# Altium PCB ut_mbed_programmer.PcbDoc
Units mm, origin at the board's own origin, x right, y up, seen from the top; angles counter-clockwise.
Board outline 30 x 16 mm, 2 copper layers (Top Layer, Bottom Layer), stack 1.571 mm thick; 33 components, 30 nets, 148 pads, 33 vias.
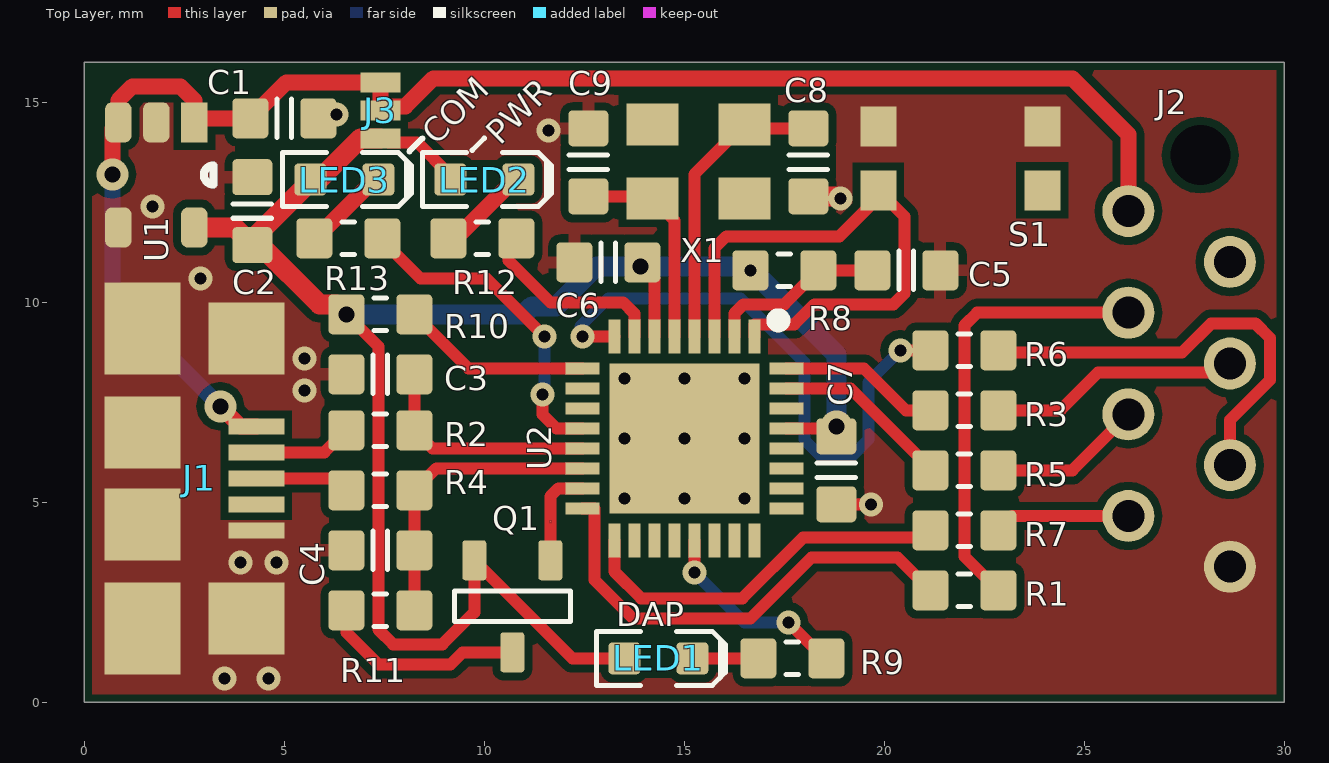
[diagram p0: Top Layer view]
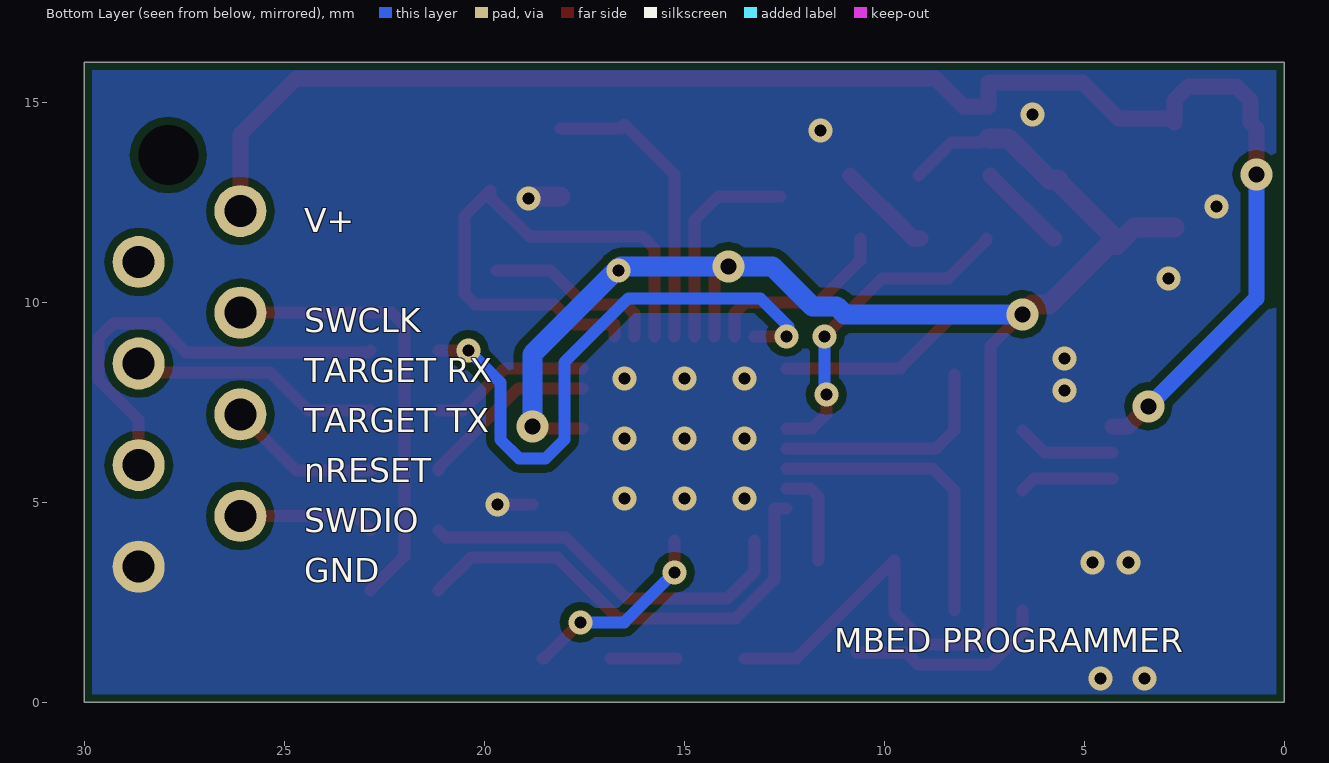
[diagram p1: Bottom Layer view, seen from below]
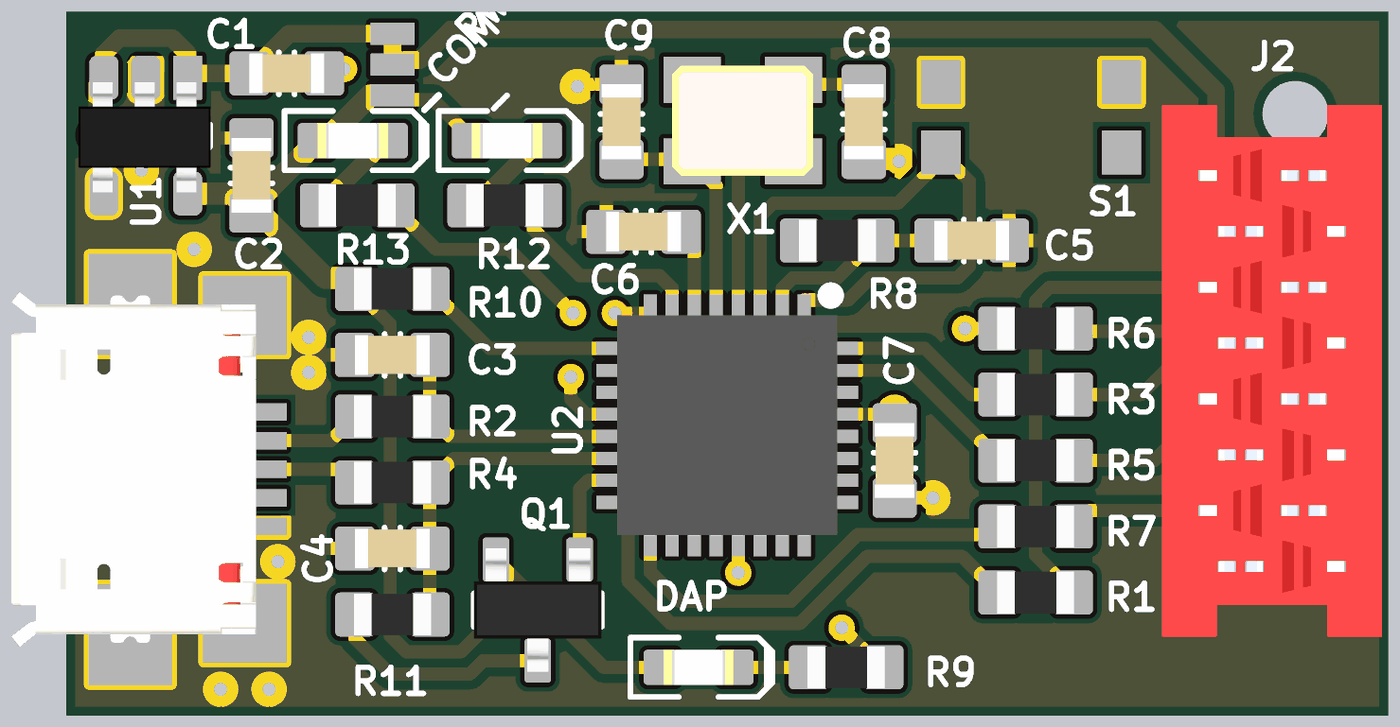
[diagram p2: 3D render of the assembled board from above, using the file's embedded part models]

## Layer stack, top to bottom
Top Solder: solder mask 0.0102, Solder Resist, Dk 3.5
Top Layer: signal copper 0.0356
Dielectric 1: dielectric 1.5, FR-4, Dk 4.8
Bottom Layer: signal copper 0.0356
Bottom Solder: solder mask 0.0102, Solder Resist, Dk 3.5

## Board outline
0,0 30,0 30,16 0,16

## Design rules (kind name [scope] priority, off if disabled: settings)
BoardOutlineClearance [All] p1: gap=0.2 ignorepadtopadclearanceinfootprint=FALSE except(0: Arc-SplitContinuation Track-SplitContinuation SMDPad-SplitContinuation THPad-SplitContinuation Via-SplitContinuation Fill-SplitContinuation Poly-SplitContinuation Region-SplitContinuation Text-SplitContinuation)
Clearance [All] p1: gap=0.2 ignorepadtopadclearanceinfootprint=FALSE except(0: Arc-Hole Track-Hole SMDPad-Hole THPad-Hole Via-Hole Fill-Hole Poly-Hole Region-Hole Text-Hole)
ComponentClearance [All] p1: gap=0.2 collisioncheckmode=3 verticalgap=0.2 showdistances=FALSE
HoleSize [All] p1: absolutevalues=TRUE maxlimit=5 minlimit=0.3 maxpercent=80.000 minpercent=20.000
HoleToHoleClearance [All] p1: gap=0.3 allowstackedmicrovias=TRUE
MinimumSolderMaskSliver [All] p1: minsoldermaskwidth=0.2
PolygonConnect PolygonConnectDirect [IsVia or InComponent('J1' ) or InComponent('J2') or InComponent('U1') or InComponent('S1')] p1: connectstyle=Direct reliefconductorwidth=0.3 reliefentries=4 polygonreliefangle="90 Angle" airgapwidth=0.2
PolygonConnect [All] p2: connectstyle=Relief reliefconductorwidth=0.3 reliefentries=4 polygonreliefangle="90 Angle" airgapwidth=0.2
RoomDefinition ut_mbed_programmer [InComponentClass('ut_mbed_programmer')] p1: confinementstyle=ConfineIn formatcopy=TRUE lockcomponents=FALSE outline -8,-6.85 69.3,-6.85 69.3,44.85 -8,44.85
RoutingVias [All] p1: holewidth=0.3 width=0.6 viastyle="Through Hole" minholewidth=0.3 minwidth=0.6 maxholewidth=5 maxwidth=10
SilkToSilkClearance [All] p1: silktosilkclearance=0.2
SilkToSolderMaskClearance [IsPad] p1: minsilkscreentomaskgap=0.2 clearancetoexposedcopper=TRUE
SolderMaskExpansion SolderMaskExpansionVia [IsVia] p1: expansion=-5
SolderMaskExpansion [All] p2: expansion=0.102
Width [All] p1: maxlimit=5 minlimit=0.2 preferedwidth=0.3
24 further rules are at their usual default settings.

## Components (designator, comment, footprint, x,y, rotation, side; value= is the part's Value field where it differs from the comment)
C1 "1u" CAPC1608X90N 5,14.6 r0 top value=1µ
C2 "1u" CAPC1608X90N 4.2,12.28 r90 top value=1µ
C3 "18p" CAPC1608X90N 7.4,8.2 r180 top value=8p
C4 "18p" CAPC1608X90N 7.4,3.8 r180 top value=8p
C5 "100n" CAPC1608X90N 20.55,10.8 r0 top value=8p
C6 "100n" CAPC1608X90N 13.1,11 r180 top value=8p
C7 "100n" CAPC1608X90N 18.8,5.8 r270 top value=8p
C8 "18p" CAPC1608X90N 18.1,13.5 r270 top value=8p
C9 "18p" CAPC1608X90N 12.6,13.5 r90 top value=8p
J1 "USB-B-MICRO" USB-B-MICRO-FCI-10104110 4.3,5.6 r270 top
J2 "HEADER-8" MICRO-MATCH-FOB-08 26.1,12.28 r90 top
J3 "JUMPER" JUMPER-SMD-3WAY-1005 7.4,14.8 r270 top
LED1 "White" LED-0603-WHITE 14.35,1.1 r0 top
LED2 "White" LED-0603-WHITE 10,13.07 r0 top
LED3 "White" LED-0603-WHITE 6.5,13.07 r0 top
Q1 "BSS84" SOT23-3 10.7,2.4 r270 top
R1 "470R" RESC1608X55N 22,2.8 r0 top value=1K
R2 "33R" RESC1608X55N 7.4,6.8 r0 top value=1K
R3 "470R" RESC1608X55N 22,7.3 r0 top value=1K
R4 "33R" RESC1608X55N 7.4,5.3 r0 top value=1K
R5 "470R" RESC1608X55N 22,5.8 r0 top value=1K
R6 "470R" RESC1608X55N 22,8.8 r0 top value=1K
R7 "470R" RESC1608X55N 22,4.3 r0 top value=1K
R8 "10k" RESC1608X55N 17.5,10.8 r0 top value=1K
R9 "470R" RESC1608X55N 17.7,1.1 r180 top value=1K
R10 "10k" RESC1608X55N 7.4,9.7 r180 top value=1K
R11 "1.5k" RESC1608X55N 7.4,2.3 r180 top value=1K
R12 "470R" RESC1608X55N 9.95,11.6 r180 top value=1K
R13 "470R" RESC1608X55N 6.6,11.6 r180 top value=1K
S1 "PUSHBUTTON" KMR421NGLFS 21.9,13.6 r0 top
U1 "MIC5504-3.3" SOT23-5 2.75,14.5 r270 top
U2 "LPC11U35FHN33" HVQFN33 16.75,9.15 r270 top
X1 "12MHz" XTAL-3.2x2.5 16.5,14.45 r180 top

## Footprints (in the part's own frame and the unit in brackets; to place one, negate y for a bottom-side part, rotate by r counter-clockwise, add the part's x,y. Pads: shape width x height; smd on the part's side, far side on the other; paste and mask are expansions set on the pad)
CAPC1608X90N [mm] "Chip Capacitor, Body 1.6x0.8mm, EIA 0603, IPC Medium Density"
  round 0.254 on Mech15: 0(0,0)
  rrect25% 0.9x1 smd: 1(-0.85,0) 2(0.85,0)
  Top Layer pour cut-out: -0.6,0.5 -0.4,0.7 0.4,0.7 0.6,0.5 0.6,-0.5 0.4,-0.7 -0.4,-0.7 -0.6,-0.5
  silkscreen extent -0.18,-0.48 0.18,0.48, body extent -0.85,-0.45 0.85,0.45, height 0.89
HVQFN33 [mm]
  rect 0.85x0.3 smd: 1(0,0) 2(0,-0.5) 3(0,-1) 4(0,-1.5) 5(0,-2) 6(0,-2.5) 7(0,-3) 8(0,-3.5) 17(5.1,-3.5) 18(5.1,-3) 19(5.1,-2.5) 20(5.1,-2) 21(5.1,-1.5) 22(5.1,-1) 23(5.1,-0.5) 24(5.1,0)
  rect 0.3x0.85 smd: 9(0.8,-4.3) 10(1.3,-4.3) 11(1.8,-4.3) 12(2.3,-4.3) 13(2.8,-4.3) 14(3.3,-4.3) 15(3.8,-4.3) 16(4.3,-4.3) 25(4.3,0.8) 26(3.8,0.8) 27(3.3,0.8) 28(2.8,0.8) 29(2.3,0.8) 30(1.8,0.8) 31(1.3,0.8) 32(0.8,0.8)
  rect 3.75x3.75 smd: 33(2.55,-1.75)
  silkscreen extent -0.5,0.5 -0.3,0.7, body extent 0.05,-4.25 5.05,0.75, height 0.94
JUMPER-SMD-3WAY-1005 [mm]
  rect 0.5x1 smd: 1(-0.7,0) 2(0,0) 3(0.7,0)
KMR421NGLFS [mm]
  rect 0.9x1 smd: 1(-2.05,0.8) 1(2.05,0.8) 2(-2.05,-0.8) 2(2.05,-0.8)
  body extent -2.1,-1.4 2.1,1.4, height 2.5
LED-0603-WHITE [mm]
  round 0.254 on Mech15: 0(0,0)
  rrect25% 0.8x0.8 smd: A(-0.85,0) K(0.85,0)
  Top Layer pour cut-out: -0.5,0.5 0.5,0.5 0.5,-0.5 -0.5,-0.5
  silkscreen extent -1.55,-0.67 1.68,0.67, body extent -0.8,-0.4 0.8,0.4, height 0.75
MICRO-MATCH-FOB-08 [mm]
  round 1.3 hole 0.8: 1(0,0) 2(-1.27,-2.54) 3(-2.54,0) 4(-3.81,-2.54) 5(-5.08,0) 6(-6.35,-2.54) 7(-7.62,0) 8(-8.89,-2.54)
  round 0 hole 1.5 unplated: drill(1.4,-1.8)
  body extent -10.49,-3.77 1.6,1.23, height 4
RESC1608X55N [mm] "Chip Resistor, Body 1.6x0.8mm, EIA 0603, IPC Medium Density"
  round 0.254 on Mech15: 0(0,0)
  rrect25% 0.9x1 smd: 1(-0.85,0) 2(0.85,0)
  Top Layer pour cut-out: -0.6,0.5 -0.4,0.7 0.4,0.7 0.6,0.5 0.6,-0.5 0.4,-0.7 -0.4,-0.7 -0.6,-0.5
  silkscreen extent -0.15,-0.41 0.15,0.41, body extent -0.87,-0.47 0.88,0.48, height 0.54
SOT23-3 [mm] "SOT23, 3 pin"
  round 0.5 on Mech15: 0(0,0)
  rrect25% 1x0.6 smd: 1(-1.15,0.95) 2(-1.15,-0.95) 3(1.15,0)
  silkscreen extent -0.38,-1.45 0.38,1.45, body extent -1.4,-1.45 1.4,1.45, height 1.29
SOT23-5 [mm]
  rect 1x0.66 smd: 1(0,0)
  rrect50% 1x0.66 smd: 2(0,-0.95) 3(0,-1.9) 4(2.63,-1.9) 5(2.63,0)
  silkscreen extent 1.08,0.24 1.55,0.48, body extent 0.1,-2.47 2.6,0.53, height 1.11
USB-B-MICRO-FCI-10104110 [mm]
  rect 0.4x1.4 smd: 1(-1.3,0) 2(-0.65,0) 3(0,0) 4(0.65,0) 5(1.3,0)
  rect 2.3x1.9 smd: SH(-3.75,-2.85) SH(3.758,-2.85)
  rect 1.8x1.9 smd: SH(-3.5,-0.25) SH(-1.15,-2.85) SH(1.15,-2.85) SH(3.5,-0.25)
  body extent -4.04,-5.55 4.04,0.01, height 2.68
XTAL-3.2x2.5 [mm]
  rect 1.3x1.05 smd: 1(0,0) 2(2.3,0) 3(2.3,1.85) 4(0,1.85)
  body extent -0.45,-0.32 2.75,2.18, height 0.8

## Part data
C1 C2: library part CAPC_1u_0603_X7R_16V_10%, "Capacitor SMD Cer 1uF 10% 16V X7R 0603", Manufacturer 1="TDK Corporation", Manufacturer Part Number 1=C1608X7R1C105K, Package / Case="0603 (1608 metric)", Ratings="16V; X7R", Supplier Part Number 1=445-1604-1-ND, Tolerance=±10%, ComponentLink1Description=http://product.tdk.com/capacitor/mlcc/en/documents/mlcc_commercial_general_en.pdf, ComponentLink1URL=http://product.tdk.com/capacitor/mlcc/en/documents/mlcc_commercial_general_en.pdf, Material=ceramic, SCDType=spec, Supplier 1=Digi-Key
C3 C4 C5 C6 C7 C8 C9: library part CAPC_8p_0603_NP0_50V, "Capacitor SMD Cer 8pF ±0.5pF 50V NP0 0603", Manufacturer 1="Murata Electronics North America", Manufacturer Part Number 1=GRM1885C1H8R0DZ01D, Operating Temperature="-55°C ~ 125°C", Package / Case="0603 (1608 Metric)", Ratings="50V; NP0", Supplier Part Number 1=490-1399-1-ND, Tolerance=±0.5pF, ComponentLink1Description="GRM1885C1H8R0DZ01 datasheet.pdf", ComponentLink1URL=http://search.murata.co.jp/Ceramy/image/img/PDF/ENG/GRM1885C1H8R0DZ01.pdf, SCDType=undef, Size / Dimension="0.063\" L x 0.032\" W (1.60mm x 0.81mm)", Supplier 1=Digi-Key, Thickness (Max)="0.035\" (0.90mm)"
J3: library part JUMPER-SMD-3WAY
LED1 LED2 LED3: library part LED_SMD_White_0603_Bright, "LED 0603 SMD Bright White 8700K", Luminous Flux @ Current - Test=-, Manufacturer 1="Lite-On Inc", Manufacturer 2="Kingbright Corp", Manufacturer Part Number 1=LTW-C193TS5, Manufacturer Part Number 2=APT1608QWF/D, Millicandela Rating=230mcd, Package / Case="0603 (1608 metric)", Ratings="Ultra Bright; 8700K", Supplier Part Number 1=160-1721-1-ND, Voltage - Forward (Vf) @ 10mA=3.0V, Voltage - Forward (Vf) Typ=3.3V, Color=White, ComponentLink1Description=http://media.digikey.com/pdf/Data%20Sheets/Lite-On%20PDFs/LTW-C193TS5.pdf, ComponentLink1URL=http://media.digikey.com/pdf/Data%20Sheets/Lite-On%20PDFs/LTW-C193TS5.pdf, ComponentLink2Description=http://www.kingbrightusa.com/images/catalog/SPEC/APT1608QWF-D.pdf, ComponentLink2URL=http://www.kingbrightusa.com/images/catalog/SPEC/APT1608QWF-D.pdf, Lens Style/Size="Rectangle with Flat Top, 0.8mm x 1.1mm", Lens Type="Clear, Tinted", Material=InGaN, Mounting Type="Surface Mount", SCDType=source, Size / Dimension="1.60mm L x 0.80mm W", Supplier 1=Digi-Key, Supplier 2=Digi-Key, Supplier Part Number 2=APT1608QWF/D-ND, Viewing Angle=120°
Q1: library part MOSFET_BSS84, "MOSFET SMD P-CH 50V 130mA SOT23-3", Current - Continuous Drain (Id) @ 25° C=130mA, Drain to Source Voltage (Vdss)=50V, Input Capacitance (Ciss) @ Vds="73pF @ 25V", Manufacturer 1="Fairchild Semiconductor", Package / Case=SOT23-3, Power - Max=360mW, Ratings="50V; 130mA", Supplier Device Package=SOT-23, Supplier Part Number 1=BSS84CT-ND, ComponentLink1Description=http://www.fairchildsemi.com/ds/BS/BSS84.pdf, ComponentLink1URL=http://www.fairchildsemi.com/ds/BS/BSS84.pdf, FET Feature="Logic Level Gate", FET Type="MOSFET P-Channel, Metal Oxide", Gate Charge (Qg) @ Vgs="1.3nC @ 5V", Manufacturer Part Number 1=BSS84, Material="Metal Oxide", Rds On (Max) @ Id, Vgs="10 Ohm @ 100mA, 5V", SCDType=undef, Supplier 1=Digi-Key, Vgs(th) (Max) @ Id="2V @ 1mA"
R1 R2 R3 R4 R5 R6 R7 R8 R9 R10 R11 R12 R13: library part RES_1K_0603_1%, "Resistor SMD chip 1k Ohm 0.1W 1% 0603", Manufacturer 1=Yageo, Manufacturer Part Number 1=RC0603FR-071KL, Package / Case="0603 (1608 Metric)", Ratings=1/10W, Supplier Part Number 1=311-1.00KHRCT-ND, Tolerance=±1%, SCDType=spec, Supplier 1=Digi-Key
U1: library part LDO-SOT23-5
X1: library part XTAL-3.2X2.5

## Via types
v1: diameter 0.6, hole 0.3, Top Layer to Bottom Layer, 28 vias
v2: diameter 0.8, hole 0.4, Top Layer to Bottom Layer, 5 vias

## Nets (pads, with @x,y where several pads share a name; then routed paths per layer and width w, separated by ;. In a path a pad name is that pad's centre, name@x,y a point inside that pad or via, vN(x,y) a via of type N, cw(c..) or ccw(c..) an arc to the next point about the centre after c; other vN are vias at no path point)
3.3V: C2.1 C6.1 C7.1 J3.3 LED1.A LED2.A LED3.A Q1.2 R8.1 R10.2 U1.5 U2.6 U2.29 | length 46.4
  Top Layer w0.3: v2(6.55,9.7) 7.35,8.9 7.35,1.821 7.721,1.45 8.95,1.45 9.75,2.25 Q1.2@9.75,3.451 ; J3.3@7.4,14.2 7.6,14 8.32,14 LED2.A@9.15,13.17 ; Q1.2 12.2,1.1 LED1.A ; U2.6 C6.1@14.25,10.6 ; U2.29 C7.1@18.7,6.85
  Top Layer w0.5: U1.5 3.76,11.87 C2.1 ; v2(6.55,9.7) 6.3,9.95 5.88,9.95 4.4,11.43 C2.1 ; J3.3 6.902,14.1 5.872,13.07 LED3.A 5.65,13.02 4.2,11.57 C2.1
  Bottom Layer w0.5: v2(6.55,9.7) 10.989,9.7 11.189,9.9 11.8,9.9 12.8,10.9 v2(13.9,10.9) 16.6,10.9 18.8,8.7 v2(18.8,6.9)
  other v1: 16.65,10.8
GND: C1.2 C2.2 C3.2 C4.2 C5.2 C6.2 C7.2 C8.2 C9.2 J1.5 J1.SH J2.8 S1.1 U1.2 U1.4 U2.33 | length 1.7
  Top Layer w0.3: C7.2 v1(19.67,4.95)
  Top Layer w0.5: C8.2 18.85,12.65 v1(18.9,12.6)
  other v1: 3.5,0.6 4.6,0.6 3.9,3.5 4.8,3.5 13.5,5.1 15,5.1 16.5,5.1 13.5,6.6 15,6.594 16.5,6.6 5.5,7.8 13.5,8.1 15,8.1 16.5,8.1 5.5,8.6 2.9,10.6 1.7,12.4 11.6,14.3 6.3,14.7
ISP_BTN: S1.2 U2.1 U2.3 | length 14.2
  Top Layer w0.3: U2.3 15.75,11.35 16.05,11.65 18.879,11.65 19.85,12.621 19.85,12.8 20.5,12.15 20.5,10.221 20.229,9.95 18.25,9.95 17.75,9.45 16.75,9.45 U2.1
LED_HID: R13.1 U2.12 | length 8.2
  Top Layer w0.3: R13.1 7.45,11.55 8.4,10.6 10.05,10.6 v1(11.5,9.15) ; v1(11.45,7.7) 11.45,7.2 11.8,6.85 U2.12
  Bottom Layer w0.3: v1(11.45,7.7) 11.5,7.75 v1(11.5,9.15)
LED_MSD: R12.1 U2.7 | length 4.8
  Top Layer w0.3: R12.1@10.6,11.6 10.6,11.05 11.65,10 13.47,10 13.75,9.72 U2.7
LED_UART: R9.1 U2.21 | length 5
  Top Layer w0.3: v1(15.25,3.25) U2.21 ; v1(17.6,2) 18.5,1.1 R9.1
  Bottom Layer w0.3: v1(15.25,3.25) 16.5,2 v1(17.6,2)
NetJ1_2: J1.2 R2.1 | length 2.5
  Top Layer w0.3: J1.2 6,6.25 R2.1
NetJ1_3: J1.3 R4.1 | length 2.4
  Top Layer w0.3: J1.3 6.25,5.6 R4.1
NetLED1_K: LED1.K R9.2 | length 1.6
  Top Layer w0.3: LED1.K R9.2
NetLED2_K: LED2.K R12.2 | length 2.4
  Top Layer w0.4: R12.2 9.28,11.6 LED2.K@10.85,13.17
NetLED3_K: LED3.K R13.2 | length 2.3
  Top Layer w0.4: R13.2 5.78,11.6 LED3.K@7.35,13.17
NetQ1_3: Q1.3 R11.2 | length 5.2
  Top Layer w0.3: R11.2 6.55,1.75 7.35,0.95 9.157,0.95 9.457,1.25 Q1.3
NRESET: R6.1 U2.8 | length 14.8
  Top Layer w0.3: v1(12.45,9.15) U2.8 ; v1(20.4,8.8) R6.1
  Bottom Layer w0.3: v1@12.4,9.2 12.4,9.4 13.1,10.1 16.4,10.1 18,8.5 18,6.569 18.469,6.1 19.131,6.1 19.6,6.569 19.6,8 v1(20.4,8.8)
RESET: C5.1 R8.2 U2.2 | length 4.5
  Top Layer w0.3: U2.2 16.25,9.72 16.48,9.95 17.5,9.95 R8.2 C5.1
RX: R3.1 U2.32 | length 4
  Top Layer w0.3: U2.32 19.486,8.35 20.536,7.3 R3.1
SWCLK: R1.1 U2.16 | length 11.9
  Top Layer w0.3: U2.16 12.75,4.85 12.75,3.476 12.75,3.062 13.712,2.1 16.657,2.1 18.175,3.618 20.332,3.618 R1.1
SWDIO: R7.1 U2.17 | length 9.7
  Top Layer w0.3: U2.17 13.25,3.269 13.919,2.6 16.45,2.6 17.968,4.118 20.968,4.118 R7.1
TGT_NRESET: J2.6 R6.2 | length 10.9
  Top Layer w0.3: R6.2 22.91,8.74 27.44,8.74 28.17,9.47 29.28,9.47 29.64,9.11 29.64,8.056 28.64,7.056 J2.6
TGT_RX: J2.4 R3.2 | length 6.3
  Top Layer w0.3: R3.2 24.4,7.3 25.34,8.24 28.41,8.24 J2.4
TGT_SWCLK: J2.3 R1.2 | length 11.2
  Top Layer w0.3: R1.2 22,3.65 22,9.42 22.32,9.74 J2.3
TGT_SWDIO: J2.7 R7.2 | length 3.4
  Top Layer w0.3: R7.2 23.21,4.66 J2.7
TGT_TX: J2.5 R5.2 | length 3.8
  Top Layer w0.3: R5.2 24.7,5.8 J2.5
TX: R5.1 U2.31 | length 4.5
  Top Layer w0.3: U2.31 19.15,7.85 21.15,5.85 R5.1
USB_D+: C4.1 R4.2 R11.1 U2.14 | length 7.4
  Top Layer w0.3: R11.1 C4.1 R4.2 8.8,5.85 U2.14
USB_D-: C3.1 R2.2 U2.13 | length 5.8
  Top Layer w0.3: C3.1 R2.2 8.7,6.35 U2.13
USB_SCON: Q1.1 U2.15 | length 2.5
  Top Layer w0.3: Q1.1 11.65,5.15 11.85,5.35 U2.15
USB_VBUS: R10.1 U2.9 | length 4.8
  Top Layer w0.3: R10.1 9.6,8.35 U2.9
VBUS: C1.1 J1.1 J2.1 J3.1 J3.2 U1.1 U1.3 | length 39.8
  Top Layer w0.4: v2(0.7,13.2) 0.7,14.35 U1.3 0.85,15.05 1.2,15.4 2.4,15.4 2.75,15.05 U1.1 2.85,14.6 C1.1 5.05,15.5 J3.1 7.4,14.9 8.025,14.9 8.725,15.6 24.7,15.6 26.1,14.2 J2.1 ; v2(3.4,7.4) 3.9,6.9 J1.1
  Bottom Layer w0.4: v2(0.7,13.2) 0.7,10.1 v2(3.4,7.4)
XIN: C8.1 U2.4 X1.1 | length 7.5
  Top Layer w0.3: U2.4 15.25,13.2 X1.1 16.6,14.35 C8.1
XOUT: C9.1 U2.5 X1.3 | length 5.3
  Top Layer w0.3: C9.1 14.15,12.65 X1.3 14.75,12.05 U2.5
pads on no net: C1.0 C2.0 C3.0 C4.0 C5.0 C6.0 C7.0 C8.0 C9.0 J1.4 J2.2 J2.drill LED1.0 LED2.0 LED3.0 Q1.0 R1.0 R2.0 R3.0 R4.0 R5.0 R6.0 R7.0 R8.0 R9.0 R10.0 R11.0 R12.0 R13.0 U2.10 U2.11 U2.18 U2.19 U2.20 U2.22 U2.23 U2.24 U2.25 U2.26 U2.27 U2.28 U2.30 X1.2 X1.4

## Polygon pours and split planes (outlines as drawn)
GND on Bottom Layer "GND_L02_P002" (solid, remove dead copper, pour order 2): 0,0 30,0 30,16 0,16
GND on Top Layer "GND_L01_P000" (solid, remove dead copper, pour order 0): 0,0 0,16 30,16 30,0

## Other copper
Top Layer:
  region: 18.55,1.1

## Silkscreen, mask and mechanical layers (free items; w line width, h text height)
Top Overlay:
  lines w0.13: 9.7,13.8 10,14.1
  lines w0.15: 8.127,13.773 8.45,14.1
  text "COM" at 8.8,13.9 h0.6 r45
  text "PWR" at 10.4,13.9 h0.6 r45
  text "DAP" at 13.3,1.9 h0.6
Bottom Overlay:
  text "V+" at 24.5,11.75 h0.6
  text "SWCLK" at 24.5,9.25 h0.6
  text "TARGET RX" at 24.5,8 h0.6
  text "TARGET TX" at 24.5,6.75 h0.6
  text "nRESET" at 24.5,5.5 h0.6
  text "SWDIO" at 24.5,4.25 h0.6
  text "GND" at 24.5,3 h0.6
  text "MBED PROGRAMMER" at 11.25,1.25 h0.6
Mechanical 1:
  the board outline again, w0.2